# Altium PCB BatteryBoard.PcbDoc
Units mil, origin at the board's own origin, x right, y up, seen from the top; angles counter-clockwise.
Board outline 3543.88 x 3543.5 mil, 2 copper layers (Top Layer, Bottom Layer), stack 60.4 mil thick; 36 components, 16 nets, 175 pads, 6 vias.
Unrouted connection lines stored in the file: 81.
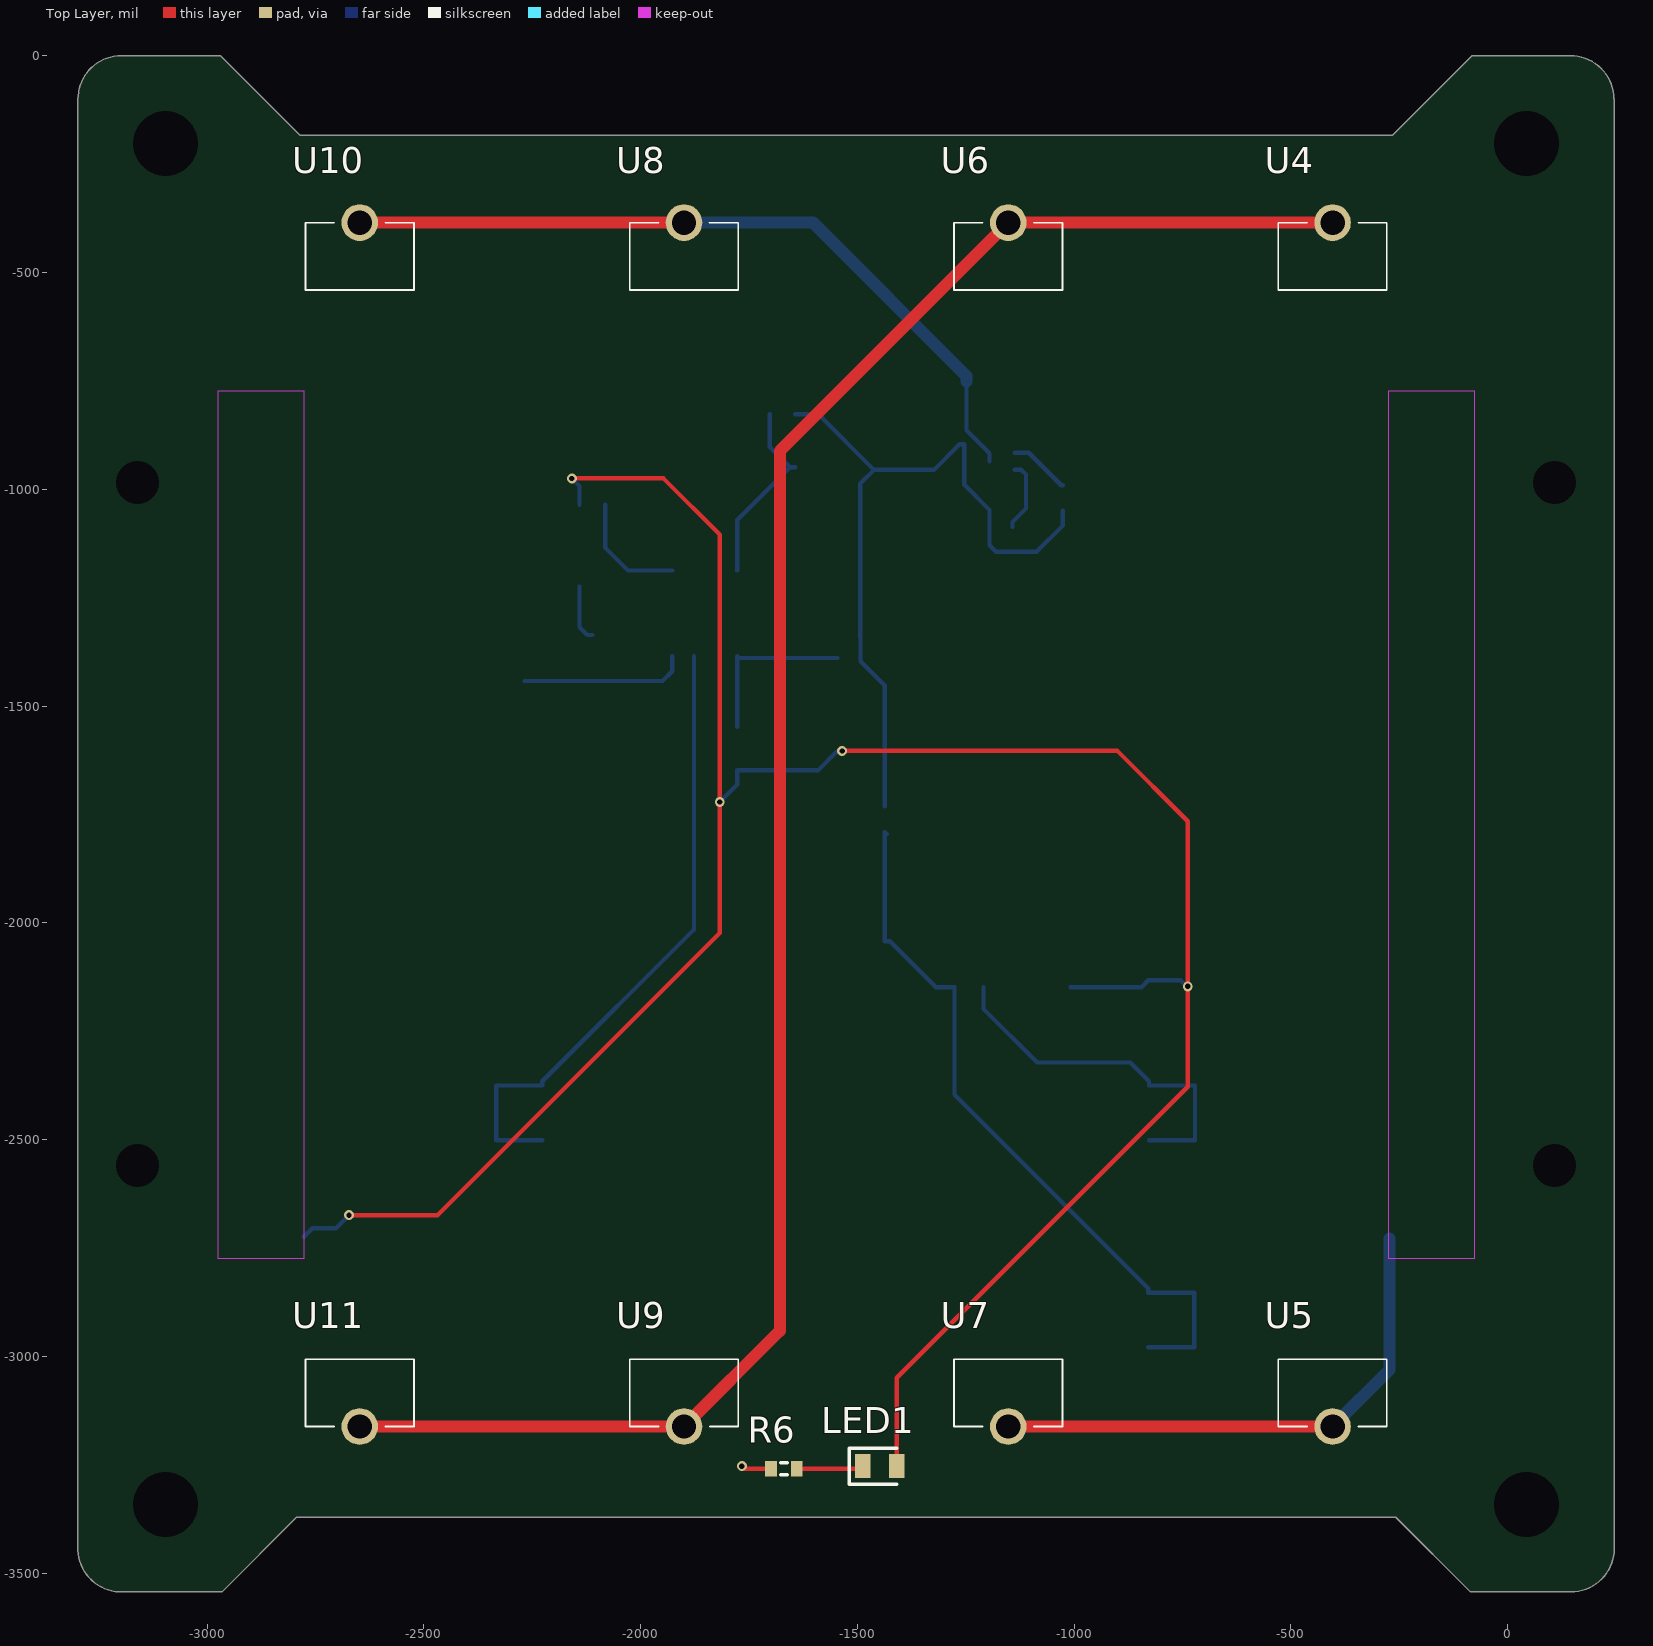
[diagram p0: Top Layer view]
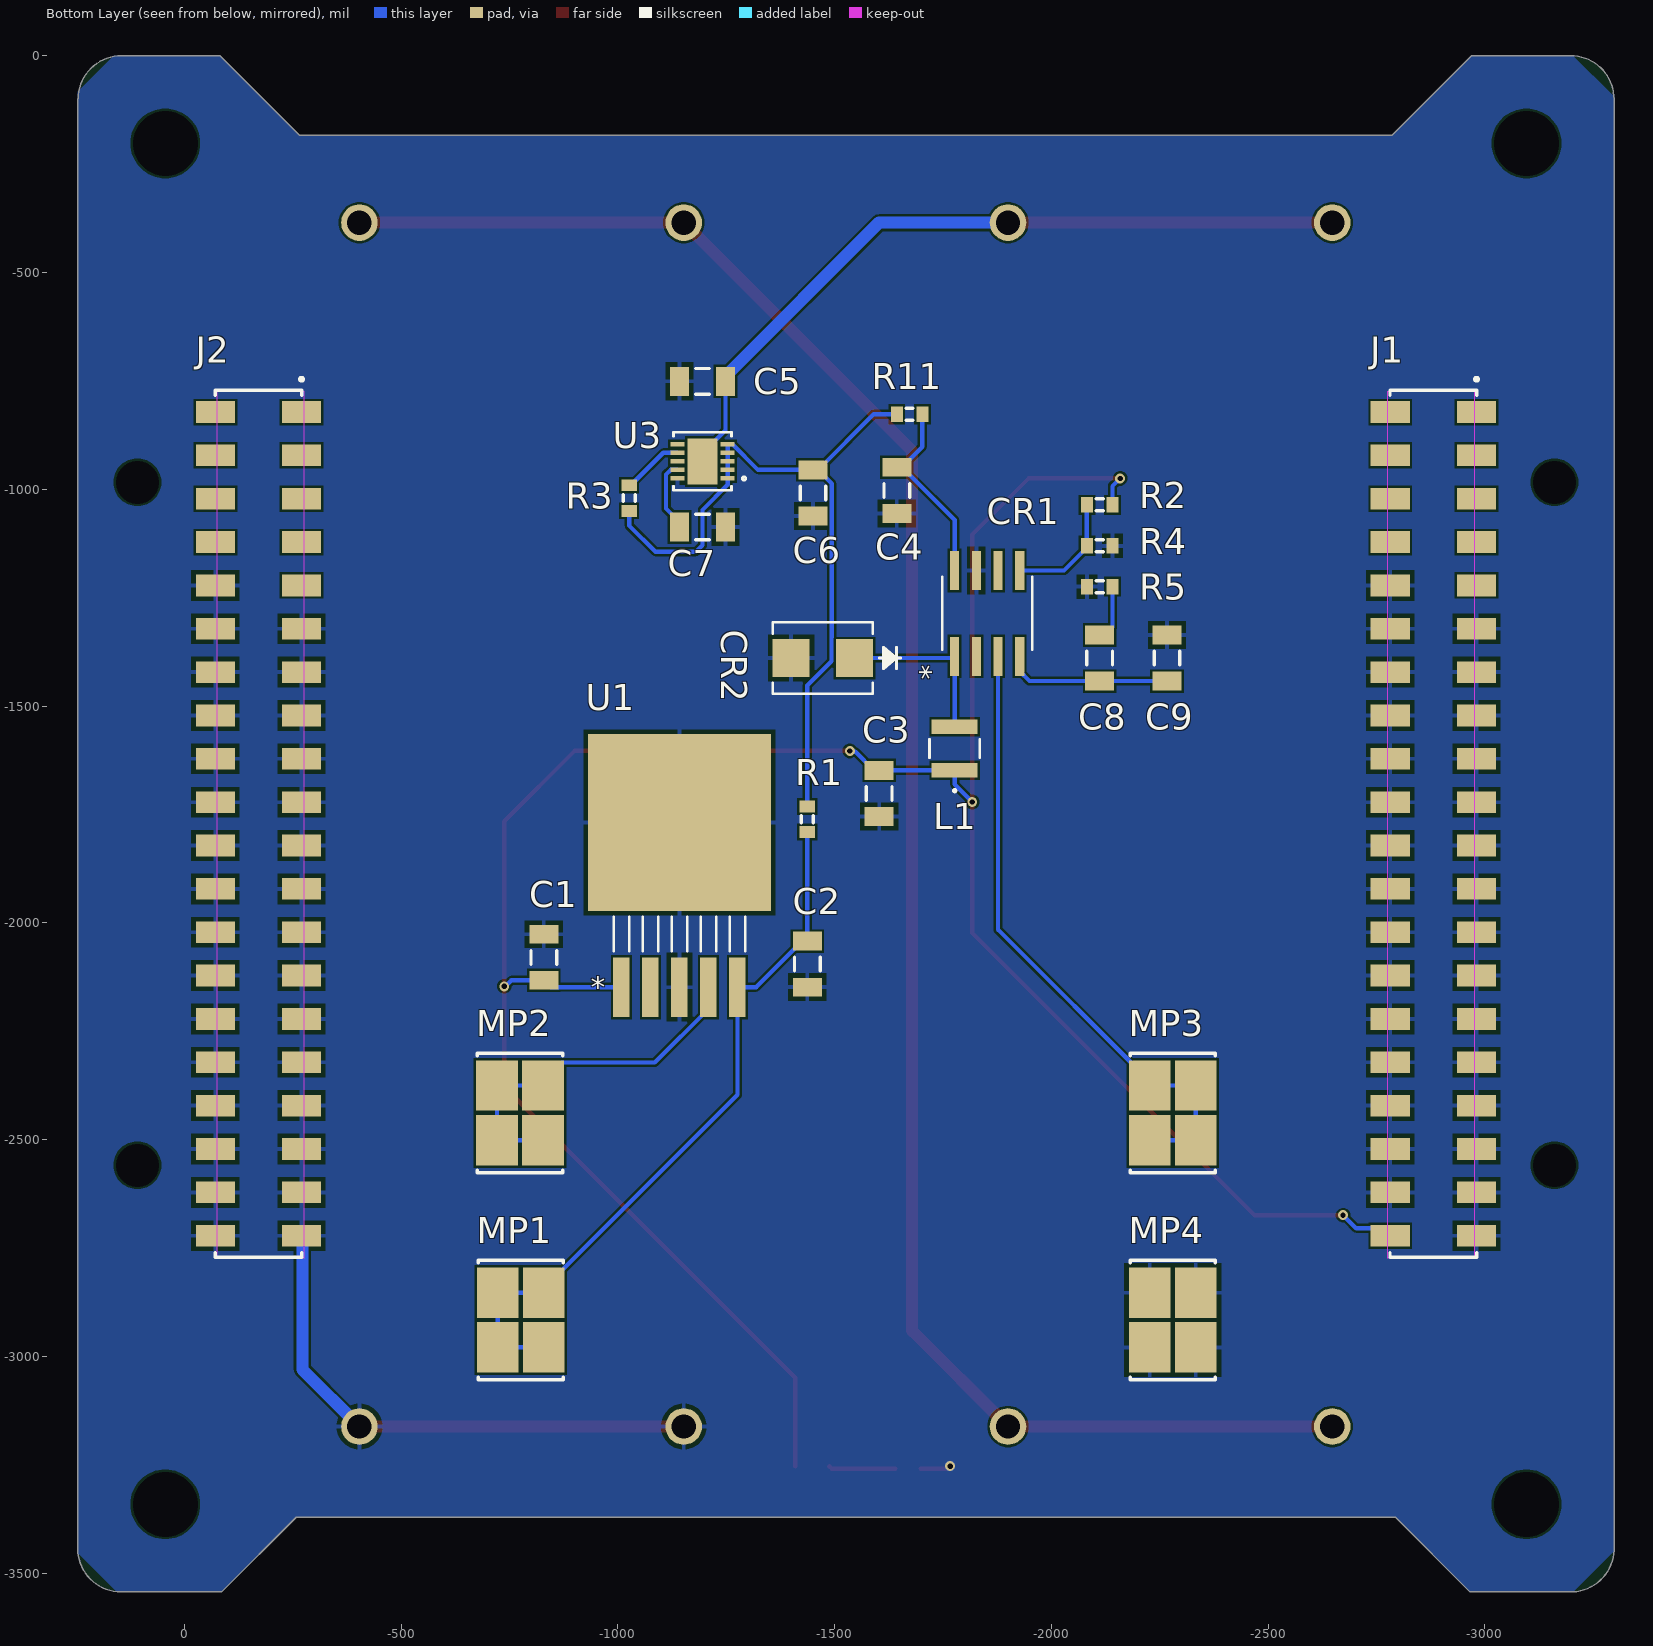
[diagram p1: Bottom Layer view, seen from below]

## Layer stack, top to bottom
Top Solder: solder mask 0.5, Solder Resist, Dk 3.3
Top Layer: signal copper 0.7
Dielectric1: core 59, FR-4, Dk 4.3
Bottom Layer: signal copper 0.7
Bottom Solder: solder mask 0.5, Solder Resist, Dk 3.3

## Board outline
-3298.02,-3438.34 ccw(c-3198.15,-3443.51) -3203.33,-3543.37 -2966.01,-3543.37 -2794.01,-3371.37 -258.01,-3371.37 -86.01,-3543.37 146.37,-3543.37 146.37,-3543.32 ccw(c145.85,-3443.33) 245.85,-3442.8 245.85,-99.35 244.97,-99.35 ccw(c144.98,-99.88) 144.45,0.12 144.45,0 -81.83,0 -83.77,-1.13 -266.01,-183.37 -2786.01,-183.37 -2969.38,0 -3198.18,0 -3198.3,0.12 ccw(c-3198.03,-99.88) -3298.03,-100.14 -3298.03,-2826.36

## Design rules (kind name [scope] priority, off if disabled: settings)
Clearance [All] p1: gap=5 ignorepadtopadclearanceinfootprint=FALSE
DiffPairsRouting [All] p1: maxlimit=10 minlimit=10 mostfreqgap=10 toplayer_minwidth=10 toplayer_maxwidth=10 toplayer_prefwidth=10 bottomlayer_minwidth=10 bottomlayer_maxwidth=10 bottomlayer_prefwidth=10 maxuncoupledlength=500
HoleSize [All] p1: absolutevalues=TRUE maxlimit=300 minlimit=10 maxpercent=80.000 minpercent=20.000
MinimumAnnularRing [All] p1: minimumring=5
MinimumSolderMaskSliver [All] p1: minsoldermaskwidth=2.5
PasteMaskExpansion [All] p1: expansion=10
PlaneClearance [All] p1: clearance=15
PlaneConnect [All] p1: pad.planeconnectstyle=Relief pad.reliefexpansion=20 pad.reliefentries=4 pad.reliefconductorwidth=10 pad.reliefairgap=10 via.planeconnectstyle=Direct via.reliefexpansion=20 via.reliefentries=4 via.reliefconductorwidth=10 via.reliefairgap=10
PolygonConnect [All] p1: thpad.connectstyle=Relief thpad.reliefconductorwidth=10 thpad.reliefentries=4 thpad.polygonreliefangle="90 Angle" thpad.airgapwidth=10 smdpad.connectstyle=Relief smdpad.reliefconductorwidth=10 smdpad.reliefentries=4 smdpad.polygonreliefangle="90 Angle" smdpad.airgapwidth=10 via.connectstyle=Direct via.reliefconductorwidth=10 via.reliefentries=4 via.polygonreliefangle="90 Angle" via.airgapwidth=10
RoutingVias [All] p1: holewidth=12 width=20 viastyle="Through Hole" minholewidth=12 minwidth=20 maxholewidth=30 maxwidth=40
SMDNeckDown [All] p1: percent=100.000
SilkToSilkClearance [All] p1: silktosilkclearance=8
SilkToSolderMaskClearance SilkscreenOverComponentPads [IsPad] p1: minsilkscreentomaskgap=3.5 clearancetoexposedcopper=TRUE
SolderMaskExpansion [All] p1: expansion=10 istentingtop=FALSE
Width [All] p1: maxlimit=28 minlimit=10 preferedwidth=10
22 further rules are at their usual default settings.

## Components (designator, comment, footprint, x,y, rotation, side; value= is the part's Value field where it differs from the comment)
C1 "Cap Semi" C1206 -829.16,-2079.52 r270 bottom value=10uF
C2 "Cap Semi" C1206 -1437.06,-2095.27 r90 bottom value=0.1uF
C3 "Cap Semi" C1206 -1602.85,-1701.52 r90 bottom value=10uF
C4 "Cap Semi" C1206 -1643.48,-1002.4 r90 bottom value=10uF
C5 "Cap Semi" C1206 -1195.29,-750.78 r0 bottom value=10uF
C6 "Cap Semi" C1206 -1450.01,-1008.3 r270 bottom value=47uF
C7 "Cap Semi" C1206 -1195.29,-1087.04 r180 bottom value=10uF
C8 "Cap Semi" C1206 -2111.55,-1389.19 r270 bottom value=22nF
C9 "Cap Semi" C1206 -2267.01,-1389.19 r270 bottom value=220pF
CR1 "L5970D" SO-8_STM-M -1852.01,-1286.26 r90 bottom
CR2 "B220-13-F" SMB_DIO -1472.81,-1389.19 r0 bottom
J1 "HLE-120-02-F-DV" SAMTEC_HLE-120-02-F-DV -2881.22,-1771.7 r90 bottom
J2 "HLE-120-02-F-DV" SAMTEC_HLE-120-02-F-DV -170.96,-1771.7 r90 bottom
L1 "CBC3225T330KR" IND_TAIYO_CBC3225_TAY -1777.01,-1598.12 r90 bottom
LED1 "APTD2012LZGCK" LEDC2012X105N -1448.38,-3253.37 r0 top
MP1 "M3" 7466303 -776.01,-2916.37 r180 bottom
MP2 "M3" 7466303 -774.41,-2438.37 r180 bottom
MP3 "M3" 7466303 -2280.01,-2438.37 r180 bottom
MP4 "M3" 7466303 -2280.01,-2916.37 r180 bottom
R1 "Res3" J1-0603 -1437.01,-1760.9 r270 bottom value="0 Ohm"
R2 "Res3" J1-0603 -2111.55,-1035.86 r0 bottom value=5.6K
R3 "Res3" J1-0603 -1026.01,-1020.11 r270 bottom value=450
R4 "Res3" J1-0603 -2111.55,-1130.38 r180 bottom value=3.3K
R5 "Res3" J1-0603 -2111.55,-1224.37 r180 bottom value=4.7K
R6 "Res3" J1-0603 -1669.48,-3259.37 r180 top value="100 Ohm"
R11 "Res3" J1-0603 -1673.01,-826.99 r180 bottom value="0 Ohm"
U1 "REG104FA-3.3/500" KTT5_TEX -1142.14,-1768.45 r180 bottom
U3 "STEF05PUR" DFN_EF05PUR_STM -1195.29,-935.47 r0 bottom
U4 "1017-1" 10171 -403.94,-384.8 r180 top
U5 "1017-1" 10171 -403.93,-3161.95 r0 top
U6 "1017-1" 10171 -1151.97,-384.8 r180 top
U7 "1017-1" 10171 -1151.96,-3161.95 r0 top
U8 "1017-1" 10171 -1900,-384.8 r180 top
U9 "1017-1" 10171 -1900,-3161.95 r0 top
U10 "1017-1" 10171 -2648.03,-384.8 r180 top
U11 "1017-1" 10171 -2648.03,-3161.95 r0 top

## Footprints (in the part's own frame and the unit in brackets; to place one, negate y for a bottom-side part, rotate by r counter-clockwise, add the part's x,y. Pads: shape width x height; smd on the part's side, far side on the other; paste and mask are expansions set on the pad)
10171 [mm]
  round 2.145 hole 1.43: 1(0,0)
  silkscreen extent -3.18,0 3.17,3.95, body extent -3.18,-0.61 3.17,3.95, height 13.94
7466303 [mm] "SMD Terminal Right Angled, Thread M3, Length 7mm"
  rect 2.45x2.95 smd paste-403.566: 1(-1.35,-1.6) 1(-1.35,1.6) 1(1.35,-1.6) 1(1.35,1.6)
  silkscreen extent -2.5,-3.5 2.5,3.5, body extent -2.5,-3.5 2.5,3.5, height 5
C1206 [mm] "Chip Capacitor, Body 3.2x1.6mm, IPC High Density"
  rect 1.1x1.7 smd: 1(-1.35,0) 2(1.35,0)
  silkscreen extent -0.4,-0.75 0.4,0.75, body extent -1.7,-0.9 1.7,0.9, height 1.3
DFN_EF05PUR_STM [mil]
  rect 32x10 smd paste+0 mask+0: 1(-58,39.38) 2(-58,19.69) 3(-58,0) 4(-58,-19.69) 5(-58,-39.38) 6(58,-39.38) 7(58,-19.69) 8(58,0) 9(58,19.69) 10(58,39.38)
  rect 69x106.3 smd paste+0 mask+0: 11(0,0)
  silkscreen extent -100,-67 67,67, body extent -62,-62 62,62, height 32
IND_TAIYO_CBC3225_TAY [mil]
  rect 33.5x106 smd paste+0 mask+0: 1(-50.25,0) 2(50.25,0)
  silkscreen extent -100,-58 21,58, body extent -68,-53 68,53, height 106
J1-0603 [mm] "Chip Resistor, Body 1.6x0.8mm, IPC High Density"
  rect 0.7x0.9 smd: 1(-0.75,0) 2(0.75,0)
  silkscreen extent -0.2,-0.35 0.2,0.35, body extent -0.85,-0.48 0.85,0.48, height 0.9
KTT5_TEX [mil]
  rect 38x138 smd paste+0 mask+0: 1(-133.86,-380) 2(-66.93,-380) 3(0,-380) 4(66.93,-380) 5(133.86,-380)
  rect 422x408 smd paste+0 mask+0: 6(0,0)
  silkscreen extent -152,-297 152,-217, body extent -210,-293 210,190, height 67
LEDC2012X105N [mm]
  rect 0.9x1.4 smd: 1(-1,0) 2(1,0)
  silkscreen extent -1.8,-1.05 1,1.05, body extent -1.03,-0.63 0.97,0.63, height 1.05
SAMTEC_HLE-120-02-F-DV [mm]
  rect 1.27x2.29 smd: 01(24.13,-2.525) 02(24.13,2.525) 03(21.59,-2.525) 04(21.59,2.525) 05(19.05,-2.525) 06(19.05,2.525) 07(16.51,-2.525) 08(16.51,2.525) 09(13.97,-2.525) 10(13.97,2.525) 11(11.43,-2.525) 12(11.43,2.525) 13(8.89,-2.525) 14(8.89,2.525) 15(6.35,-2.525) 16(6.35,2.525) 17(3.81,-2.525) 18(3.81,2.525) 19(1.27,-2.525) 20(1.27,2.525) 21(-1.27,-2.525) 22(-1.27,2.525) 23(-3.81,-2.525) 24(-3.81,2.525) 25(-6.35,-2.525) 26(-6.35,2.525) 27(-8.89,-2.525) 28(-8.89,2.525) 29(-11.43,-2.525) 30(-11.43,2.525) 31(-13.97,-2.525) 32(-13.97,2.525) 33(-16.51,-2.525) 34(-16.51,2.525) 35(-19.05,-2.525) 36(-19.05,2.525) 37(-21.59,-2.525) 38(-21.59,2.525) 39(-24.13,-2.525) 40(-24.13,2.525)
  silkscreen extent -25.4,-2.62 26.15,2.54
SMB_DIO [mm]
  rect 2.18x2.21 smd paste+0 mask+0: 1(-1.857,0) 2(1.857,0)
  silkscreen extent -4.57,-2.1 2.92,2.1, body extent -2.8,-1.97 2.8,1.97, height 2.45
SO-8_STM-M [mil]
  rect 90x21 smd paste+0 mask+0: 1(-99,75) 2(-99,25) 3(-99,-25) 4(-99,-75) 5(99,-75) 6(99,-25) 7(99,25) 8(99,75)
  silkscreen extent -84,-104 84,104, body extent -122,-99 122,99, height 69

## Part data
C1 C2 C3 C4 C5 C6 C7 C8 C9: "Capacitor (Semiconductor SIM Model)", LatestRevisionDate=29-May-2009, LatestRevisionNote="IPC-7351 Footprint Added.", PackageDescription="Chip Capacitor", PackageReference=C1206, Published=8-Jun-2000, Publisher="Altium Limited"
CR1 U3: "No Description Available", Mfr_Name=STMicroelectronics, Copyright="Copyright (C) 2022 Ultra Librarian. All rights reserved.", RefDes=RefDes, Type=DEV
  CR1: Digi-Key_Part_Number_1=497-1415-5-ND, Manufacturer_Part_Number=L5970D
  U3: Digi-Key_Part_Number_1=497-11265-2-ND, Digi-Key_Part_Number_2=497-11265-1-ND, Digi-Key_Part_Number_3=497-11265-6-ND, Manufacturer_Part_Number=STEF05PUR
CR2: "No Description Available", Mfr_Name="Diodes Inc", Copyright="Copyright (C) 2022 Ultra Librarian. All rights reserved.", Digi-Key_Part_Number_1=B220-FDICT-ND, Digi-Key_Part_Number_2=B220-FDIDKR-ND, Digi-Key_Part_Number_3=B220-FDITR-ND, Manufacturer_Part_Number=B220-13-F, RefDes=RefDes, Type=DEV
J1 J2: "Connector", Manufacturer_Name=SAMTEC, Arrow Part Number=HLE-120-02-F-DV, Arrow Price/Stock=https://www.arrow.com/en/products/hle-120-02-f-dv/samtec, Datasheet Link=http://suddendocs.samtec.com/prints/hle-1xx-02-xxx-dv-xx-xx-xx-mkt.pdf, Manufacturer_Part_Number=HLE-120-02-F-DV
L1: "No Description Available", Mfr_Name="Taiyo Yuden", Copyright="Copyright (C) 2022 Ultra Librarian. All rights reserved.", Digi-Key_Part_Number_1=587-3068-1-ND, Digi-Key_Part_Number_2=587-3068-2-ND, Digi-Key_Part_Number_3=587-3068-6-ND, Manufacturer_Part_Number=CBC3225T330KR, RefDes=RefDes, Type=DEV
LED1: "LED", Manufacturer_Name=Kingbright, Mouser2 Part Number=604-APTD2012LZGCK, Datasheet Link=https://componentsearchengine.com//APTD2012LZGCK.pdf, Height=1.05mm, Manufacturer_Part_Number=APTD2012LZGCK, Mouser2 Price/Stock=https://www.mouser.com/Search/Refine.aspx?Keyword=604-APTD2012LZGCK
MP1 MP2 MP3 MP4: library part 7466303, "WP-SMRA REDCUBE SMT Right Angled without pins, M3, 50A", Manufacturer="Wurth Elektronik", Operating Temperature Max=150°C, Operating Temperature Min=-55°C, Rated Current=50A, Category="REDCUBE SMT", ComponentLink1Description="Website Link", ComponentLink1URL=https://www.we-online.com/redexpert/article/7466303?ad, ComponentLink2Description="Datasheet Link", ComponentLink2URL=https://www.we-online.com/redexpert/spec/7466303?ad, Height=5mm, Manufacturer Part Number=7466303, Match Code=WP-SMRA, Material=Brass, Mount="Surface Mount", Packaging=Bulk, Surface=Tin, Thread Size=M3
R1 R2 R3 R4 R5 R6 R11: "Resistor", LatestRevisionDate=29-May-2009, LatestRevisionNote="IPC-7351 Footprint Added.", PackageDescription="Chip Resistor", PackageReference=J1-0603, Published=8-Jun-2000, Publisher="Altium Limited"
U1: "No Description Available", Mfr_Name="Texas Instruments", Copyright="Copyright (C) 2022 Ultra Librarian. All rights reserved.", Digi-Key_Part_Number_1=2156-REG104FA-3.3/500-ND, Digi-Key_Part_Number_2=2156-REG104FA-3.3/500-TI-ND, Digi-Key_Part_Number_3=296-REG104FA-3.3/500CT-ND, Digi-Key_Part_Number_4=296-REG104FA-3.3/500DKR-ND, Digi-Key_Part_Number_5=296-REG104FA-3.3/500TR-ND, Digi-Key_Part_Number_6=REG104FA-3.3CT-ND, Digi-Key_Part_Number_7=REG104FA-3.3DKR-ND, Digi-Key_Part_Number_8=REG104FA-3.3TR-ND, Manufacturer_Part_Number=REG104FA-3.3/500, RefDes=RefDes, Type=DEV
U4 U5 U6 U7 U8 U9 U10 U11: "Undefined or Miscellaneous", Manufacturer_Name="Keystone Electronics", Mouser Part Number=534-1017-1, Datasheet Link=https://componentsearchengine.com/Datasheets/1/1017-1.pdf, Height=13.84mm, Manufacturer_Part_Number=1017-1, Mouser Price/Stock=https://www.mouser.co.uk/ProductDetail/Keystone-Electronics/1017-1?qs=wOxb8XianXhq6%252BfB2t0c2Q%3D%3D

## Free pads (board coordinates)
  round 60 hole 150 unplated mask+10: 9(-3096.02,-202) 10(43.85,-202) 11(43.85,-3341.26) 12(-3096.02,-3341.26)
  round 60 hole 99 unplated mask+10: 13(-3160.41,-984) 14(-3160.41,-2559.37) 15(108.23,-984) 16(108.23,-2559.37)

## Via types
v1: diameter 23, hole 12, Top Layer to Bottom Layer, 6 vias

## Nets (pads, with @x,y where several pads share a name; then routed paths per layer and width w, separated by ;. In a path a pad name is that pad's centre, name@x,y a point inside that pad or via, vN(x,y) a via of type N, cw(c..) or ccw(c..) an arc to the next point about the centre after c; other vN are vias at no path point)
GND: C1.1 C2.1 C3.1 C4.1 C5.2 C6.2 C7.2 C9.1 CR1.7 CR2.2 J1.10 J1.11 J1.12 J1.13 J1.14 J1.15 J1.16 J1.17 J1.18 J1.19 J1.20 J1.21 J1.22 J1.23 J1.24 J1.25 J1.26 J1.27 J1.28 J1.29 J1.30 J1.31 J1.32 J1.33 J1.34 J1.35 J1.36 J1.37 J1.38 J1.39 J2.10 J2.11 J2.12 J2.13 J2.14 J2.15 J2.16 J2.17 J2.18 J2.19 J2.20 J2.21 J2.22 J2.23 J2.24 J2.25 J2.26 J2.27 J2.28 J2.29 J2.30 J2.31 J2.32 J2.33 J2.34 J2.35 J2.36 J2.37 J2.38 J2.39 J2.40 MP4.1 R4.2 R5.1 R6.2 U1.3 U1.6 U3.10 U5.1 U7.1 | length 1308.6
  Top Layer w10: v1(-1766.71,-3253.37) -1764,-3253.37 -1758,-3259.37 R6.2
  Top Layer w28: U7.1 U5.1@-401.96,-3161.95
  Bottom Layer w28: U5.1 -272.23,-3030.24 J2.39@-272.23,-2728.14
NetC2_2: C2.2 MP1.1 R1.2 U1.5 | length 1692.1
  Bottom Layer w10: R1.2@-1432.29,-1795.15 R1.2 R1.2 C2.2 -1425.25,-2042.12 -1318.91,-2148.45 U1.5 -1276,-2396.7 -829.16,-2843.54 -829.16,-2853.38 -722.86,-2853.38 -722.86,-2979.37 MP1.1@-829.16,-2979.37
NetC4_2: C4.2 CR1.8 R11.2 | length 442.1
  Bottom Layer w10: CR1.8 -1777.01,-1070.97 C4.2@-1655.29,-949.25 ; R11.2 -1702.54,-902 C4.2@-1655.29,-949.25 ; C4.2 C4.2@-1655.29,-949.25
NetC5_1: C5.1 U3.11 U8.1 U10.1 | length 1764.2
  Top Layer w28: U10.1@-2650,-384.8 U8.1
  Bottom Layer w10: C5.1 -1248.44,-863.67 -1195.29,-916.82 U3.11
  Bottom Layer w28: U8.1@-1897.39,-384.8 -1602.61,-384.8 -1248.44,-738.97 C5.1
NetC6_1: C6.1 R1.1 R3.2 R11.1 U3.1 U3.2 U3.3 U3.4 U3.5 | length 1771.9
  Bottom Layer w10: R11.1 -1589.98,-826.99 C6.1@-1461.82,-955.15 ; R1.1 -1437.01,-1452.45 -1493.01,-1396.45 -1493.01,-1341.55 -1493.47,-1341.08 -1493.47,-986.81 C6.1@-1461.82,-955.15 ; R3.2 -1026.01,-1083.37 -1086.8,-1144.16 -1180.16,-1144.16 -1195.29,-1129.03 -1195.29,-1047.67 -1253.29,-989.67 U3.1 U3.2 U3.3 U3.4 U3.5 -1264.29,-896.09 -1323.36,-955.15 C6.1 C6.1@-1461.82,-955.15
NetC7_1: C7.1 U3.9 | length 164.5
  Bottom Layer w10: C7.1 -1142.14,-1075.23 -1111.29,-1044.38 -1111.29,-965.71 -1121.84,-955.16 U3.9
NetC8_1: C8.1 R5.2 | length 130.8
  Bottom Layer w10: R5.2 -2141.08,-1318.33 -2123.36,-1336.04 C8.1
NetC8_2: C8.2 C9.2 CR1.4 | length 383.9
  Bottom Layer w10: C9.2 C8.2 -1949.6,-1442.34 -1927.01,-1419.76 CR1.4
NetCR1_1: CR1.1 CR2.1 L1.2 | length 395.3
  Bottom Layer w10: L1.2 CR1.1 -1773.07,-1389.19 CR2.1
NetCR1_3: CR1.3 MP3.1 | length 1473.6
  Bottom Layer w10: MP3.1@-2226.86,-2501.37 -2333.16,-2501.37 -2333.16,-2375.38 -2226.86,-2375.38 -2226.86,-2365.54 -1877.01,-2015.69 CR1.3
NetCR1_5: CR1.5 R2.2 R4.1 | length 275.4
  Bottom Layer w10: R2.2 R4.1 -2082.02,-1134.32 -2029.09,-1187.26 CR1.5
NetLED1_1: LED1.1 R6.1 | length 154.7
  Top Layer w10: R6.1 -1493.75,-3259.37 LED1.1
NetMP2_1: MP2.1 U1.4 | length 849.1
  Bottom Layer w10: U1.4 -1209.07,-2198.45 -1085.21,-2322.31 -870.79,-2322.31 -827.56,-2365.54 -827.56,-2375.38 -721.26,-2375.38 -721.26,-2501.37 MP2.1@-827.56,-2501.37
NetR3_1: R3.1 U3.7 | length 142.3
  Bottom Layer w10: U3.7 -1104.75,-915.78 -1029.95,-990.59 R3.1
NetU4_1: U4.1 U6.1 U9.1 U11.1 | length 4582.5
  Top Layer w28: U11.1@-2647.44,-3161.95 U9.1 -1678.91,-2940.87 -1678.91,-911.75 U6.1 U4.1
VCC: C1.2 C3.2 J1.40 L1.1 LED1.2 R2.1 U1.1 | length 5894.9
  Top Layer w10: v1(-2673.01,-2674.37) -2468.52,-2674.37 -1817.51,-2023.36 v1(-1817.51,-1721.21) -1817.51,-1104.54 -1947.2,-974.85 v1(-2158.8,-974.85) ; v1(-1535.01,-1603.37) -900.31,-1603.37 -738.01,-1765.68 v1(-738.01,-2146.45) -738.01,-2378.34 -1409.01,-3049.34 LED1.2
  Bottom Layer w10: J1.40@-2777.19,-2724.37 -2757.19,-2704.37 -2703.01,-2704.37 v1(-2673.01,-2674.37) ; v1(-2158.8,-974.85) -2141.08,-992.57 R2.1 ; v1(-1817.51,-1721.21) -1777.01,-1680.71 L1.1 C3.2 -1591.04,-1648.37 -1547.95,-1605.29 -1536.92,-1605.29 v1(-1535.01,-1603.37) ; U1.1 -844.94,-2148.45 C1.2 -754.49,-2132.67 -740.72,-2146.45 v1(-738.01,-2146.45)
pads on no net: CR1.2 CR1.6 J1.01 J1.02 J1.03 J1.04 J1.05 J1.06 J1.07 J1.08 J1.09 J2.01 J2.02 J2.03 J2.04 J2.05 J2.06 J2.07 J2.08 J2.09 U1.2 U3.6 U3.8

## Polygon pours and split planes (outlines as drawn)
GND on Bottom Layer "GND_L02_P002" (solid, pour order 2): -3203.22,0.11 -3203.11,0 -2969.38,0 -2786.01,-183.37 -265.2,-183.37 -81.65,0.17 162.92,0.17 245.9,-82.8 245.9,-3453.59 156.12,-3543.37 -86.01,-3543.37 -258.01,-3371.37 -2794.01,-3371.37 -2794.01,-3371.38 -2966.01,-3543.37 -3203.33,-3543.37 -3298.53,-3448.17 -3298.06,-3447.7 -3298.06,-90.29 -3293.62,-90.29

## Keep-outs
Keep-Out Layer:
  rectangle: -2976.01,-2773.37 -2776.01,-773.37
  rectangle: -276.01,-2773.37 -76.01,-773.37

## Silkscreen, mask and mechanical layers (free items; w line width, h text height)
Board:
  lines w10: -3198.3,0.12 ccw(c-3198.03,-99.88) -3298.03,-100.14 -3298.03,-2826.36 -3298.03,-3438.34 ccw(c-3198.15,-3443.51) -3203.33,-3543.37 -2966.01,-3543.37 -2794.01,-3371.37 -258.01,-3371.37 -86.01,-3543.37 146.37,-3543.37 ; -3198.18,0 -2969.38,0 -2786.01,-183.37 -266.01,-183.37 -83.77,-1.13 ; -81.83,0 144.45,0 ; 144.45,0.12 cw(c144.98,-99.88) 244.97,-99.35 ; 146.37,-3543.32 ccw(c145.85,-3443.33) 245.85,-3442.8 245.85,-99.35

## Text inside footprints (layer, text, board x,y; h text height)
CR1: Bottom Overlay "*" at -1746.51,-1439.45 h50 r270; Bottom Assembly "*" at -1806.51,-1362.76 h50 r270
U1: Bottom Overlay "*" at -937.32,-2173.45 h50; Bottom Assembly "*" at -995.78,-1973.45 h50